# Altium PCB PCB1.PcbDoc
Units mil, origin at the board's own origin, x right, y up, seen from the top; angles counter-clockwise.
Board outline 820 x 2400 mil, 2 copper layers (Top Layer, Bottom Layer); 15 components, 13 nets, 66 pads, 9 vias.
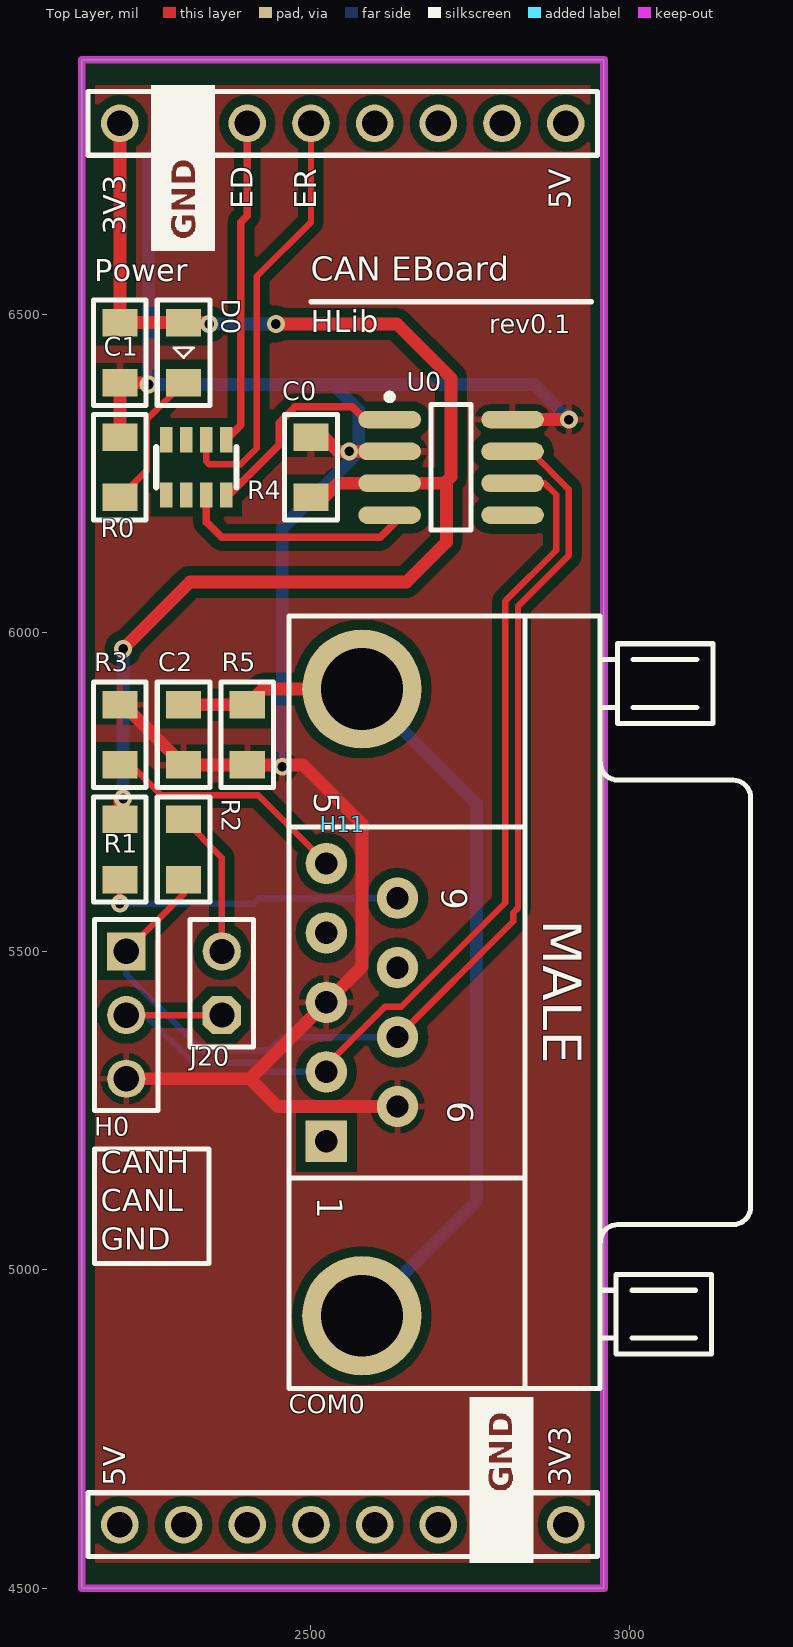
[diagram p0: Top Layer view]
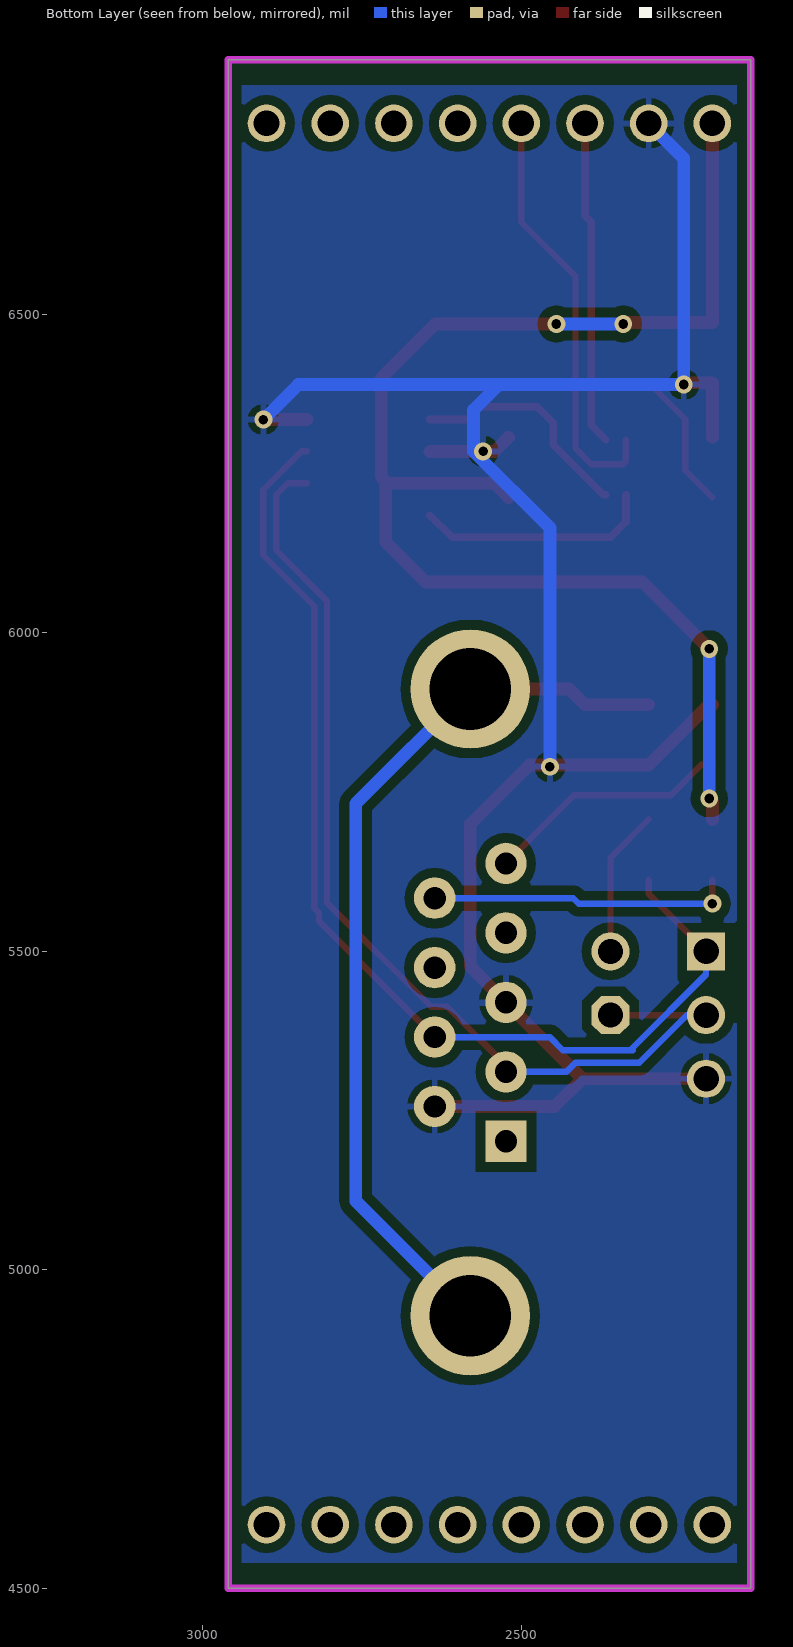
[diagram p1: Bottom Layer view, seen from below]
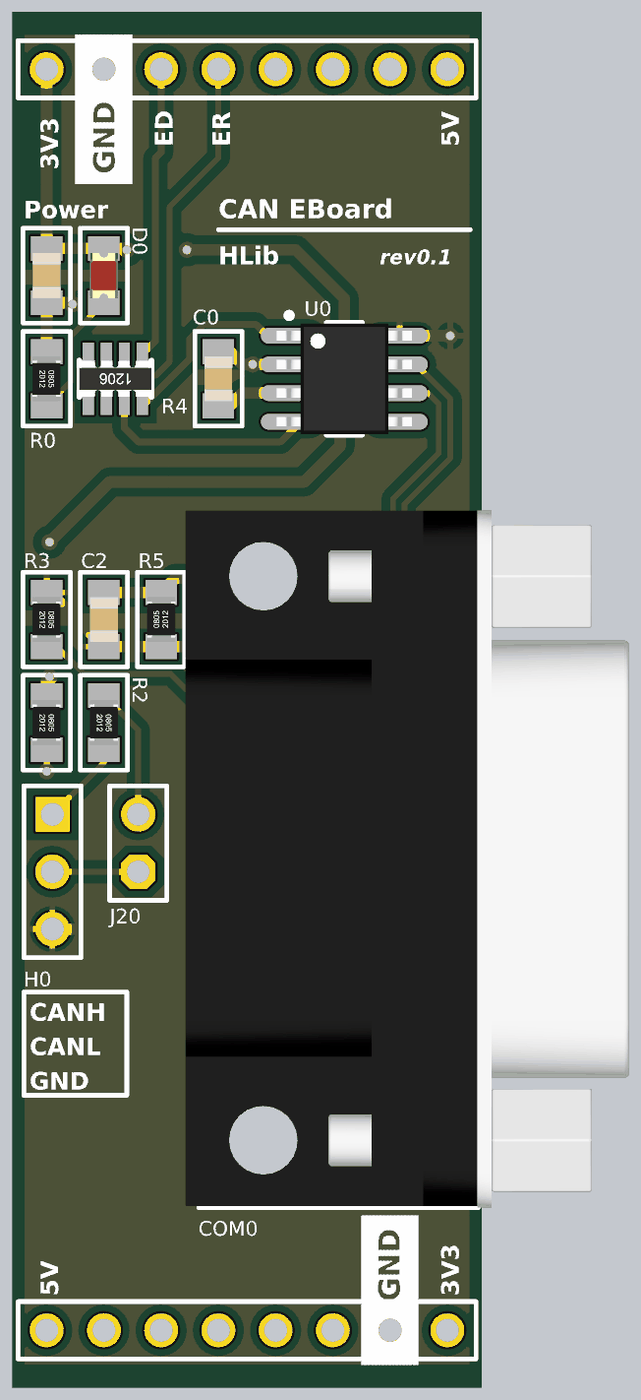
[diagram p2: 3D render of the assembled board from above, using the file's embedded part models]

## Layer stack, top to bottom
Top Solder: solder mask 0.4, Solder Resist, Dk 3.5
Top Layer: signal copper 1.4
Dielectric1: dielectric 12.6, FR-4, Dk 4.8
Bottom Layer: signal copper 1.4
Bottom Solder: solder mask 0.4, Solder Resist, Dk 3.5

## Board outline
2140,4500 2140,6900 2960,6900 2960,4500

## Design rules (kind name [scope] priority, off if disabled: settings)
Clearance [InPolygon] p1: gap=15
Clearance Clearance_1 [All] p2: gap=10
DiffPairsRouting [All] p1: maxlimit=10 minlimit=10 mostfreqgap=10 toplayer_minwidth=10 toplayer_maxwidth=15 toplayer_prefwidth=10 bottomlayer_minwidth=10 bottomlayer_maxwidth=15 bottomlayer_prefwidth=10 maxuncoupledlength=500
PolygonConnect [All] p1: connectstyle=Relief reliefconductorwidth=10 reliefentries=4 polygonreliefangle="90 Angle" airgapwidth=10
RoutingVias [All] p1: holewidth=25 width=40 viastyle="Through Hole" minholewidth=28 minwidth=50 maxholewidth=28 maxwidth=50
SolderMaskExpansion [All] p1: expansion=4
Width [All] p1: maxlimit=25 minlimit=8 preferedwidth=10
29 further rules are at their usual default settings.

## Classes and differential pairs
differential pair CAN: +CAN_P -CAN_N

## Components (designator, comment, footprint, x,y, rotation, side; value= is the part's Value field where it differs from the comment)
C0 "C_Ceramic" SM_0805_C_CERAMIC 2500,6260 r90 top
C1 "C_Ceramic" SM_0805_C_CERAMIC 2200,6440 r270 top
C2 "C_Ceramic" SM_0805_C_CERAMIC 2300,5840 r90 top
COM0 "COM 9 MALE" "DSB 9-M" 2580,5420 r90 top
D0 "LED" SM_0805_LED 2300,6440 r270 top
H0 "Hed3" Hed3 2210,5500 r270 top
H11 "MBoard1_BH_DualPorts" MBoard1_BH_DualPorts 2200,6800 r0 top
J20 "Jumper 2" HD_MALE_2_100mil_straight 2360,5400 r90 top
R0 "R" SM_0805_R 2200,6260 r270 top
R1 "R" SM_0805_R 2200,5840 r270 top
R2 "R" SM_0805_R 2300,5660 r270 top
R3 "R" SM_0805_R 2200,5660 r270 top
R4 "220" RA4 2320,6260 r180 top
R5 "R" SM_0805_R 2400,5840 r90 top
U0 "SN65HVD230" SO-8 2720,6260 r0 top

## Footprints (in the part's own frame and the unit in brackets; to place one, negate y for a bottom-side part, rotate by r counter-clockwise, add the part's x,y. Pads: shape width x height; smd on the part's side, far side on the other; paste and mask are expansions set on the pad)
"DSB 9-M" [mil] "COM MALE D Subminiature; 9 Position; Right Angle; Pitch 1.385 mm"
  rect 65x65 hole 35: 1(-218.11,55.91)
  round 65 hole 35: 2(-109.05,55.91) 3(0,55.91) 4(109.06,55.91) 5(218.11,55.91) 6(-163.58,-55.91) 7(-54.53,-55.91) 8(54.53,-55.91) 9(163.58,-55.91)
  round 187.4 hole 128.35: 10(491.93,0) 11(-491.93,0)
  silkscreen extent -606,-610 606,114, body extent -606,-637 610,138, height 495
HD_MALE_2_100mil_straight [mil]
  oct 60x60 hole 39.37: 1(0,0)
  round 60 hole 39.37: 2(100,0)
  silkscreen extent -50,-50 150,50, body extent -50,-50 150,50, height 315
Hed3 [mil]
  rect 60x60 hole 40: 1(0,0)
  round 60 hole 40: 2(100,0) 3(200,0)
  silkscreen extent -50,-50 250,50, body extent -50,-50 250,50, height 315
MBoard1_BH_DualPorts [mm]
  round 1.5 hole 1.02: 1(0,0) 2(2.54,0) 3(5.08,0) 4(7.62,0) 5(10.16,0) 6(12.7,0) 7(15.24,0) 8(17.78,0) 9(17.78,-55.88) 10(15.24,-55.88) 11(12.7,-55.88) 12(10.16,-55.88) 13(7.62,-55.88) 14(5.08,-55.88) 15(2.54,-55.88) 16(0,-55.88)
  silkscreen extent -1.27,-57.15 19.05,1.27, body extent -1.27,-57.15 19.05,1.27, height 8
RA4 [mm] "Resistor Array (0603x4) form TME"
  rect 0.5x1 smd: 1(-1.2,-1.1) 2(-1.2,1.1) 3(-0.4,-1.1) 4(-0.4,1.1) 5(0.4,-1.1) 6(0.4,1.1) 7(1.2,-1.1) 8(1.2,1.1)
  silkscreen extent -1.6,-0.8 1.6,0.8, body extent -1.6,-0.8 1.6,0.8, height 0.5
SM_0805_C_CERAMIC [mm] "General Surface-mount cap, low density"
  rect 1.1x1.4 smd: 1(-1.2,0) 2(1.2,0)
  silkscreen extent -2.1,-1.05 2.1,1.05, body extent -1,-0.62 1,0.63, height 0.58
SM_0805_LED [mm] "General polarized surface-mount Led, low density"
  rect 1.1x1.4 smd: 1(-1.2,0) 2(1.2,0)
  silkscreen extent -2.1,-1.05 2.1,1.05, body extent -1.01,-0.62 1.01,0.63, height 1.1
SM_0805_R [mm] "General Surface-mount resistor, low density"
  rect 1.1x1.4 smd: 1(-1.2,0) 2(1.2,0)
  silkscreen extent -2.1,-1.05 2.1,1.05, body extent -1,-0.63 1,0.62, height 0.45
SO-8 [mm]
  oval 2.5x0.7 smd: 1(-2.45,1.905) 2(-2.45,0.635) 3(-2.45,-0.635) 4(-2.45,-1.905) 5(2.45,-1.905) 6(2.45,-0.635) 7(2.45,0.635) 8(2.45,1.905)
  silkscreen extent -2.57,-2.5 0.8,2.93, body extent -3,-2.45 3,2.45, height 1.75

## Part data
C0 C1 C2: "Non-polarity ceramic capacitor"
COM0: library part DSB9F, "COM 9"
J20: library part "JP 2"
R0 R1 R2 R3 R5: "Resistor"
R4: library part RA4

## Via types
v1: diameter 28, hole 15, Top Layer to Bottom Layer, tented both sides, 9 vias

## Nets (pads, with @x,y where several pads share a name; then routed paths per layer and width w, separated by ;. In a path a pad name is that pad's centre, name@x,y a point inside that pad or via, vN(x,y) a via of type N, cw(c..) or ccw(c..) an arc to the next point about the centre after c; other vN are vias at no path point)
3V3: C0.1 C1.1 D0.1 H11.1 R3.1 U0.3 | length 2177.7
  Top Layer w20: R3.1 2200,5735 v1(2205,5740) ; H11.1 C1.1 D0.1 2337.76,6487.24 v1(2340,6485) ; v1(2205,5975) 2310,6080 2650,6080 2712.76,6142.76 2712.76,6232.24 2710,6235 ; v1(2445,6485) 2635,6485 2720,6400 2720,6245 2710,6235 ; C0.1@2520,6212.76 2542.24,6235 2643.54,6235 2710,6235
  Bottom Layer w20: v1(2205,5740) v1(2205,5975) ; v1(2340,6485) v1(2445,6485)
CAN_N: COM0.2 H0.2 J20.1 U0.6 | length 1627.2
  Top Layer w10: H0.2 J20.1 ; COM0.2 2524.09,5320.84 2616.23,5412.97 2641.53,5412.97 2805,5576.45 2805,6050 2885,6130 2885,6216.72 2866.72,6235 U0.6@2836.46,6235
  Bottom Layer w10: H0.2 2240,5400 2315,5325 2415,5325 2429.05,5310.95 COM0.2
CAN_P: COM0.7 H0.1 R2.2 U0.7 | length 1736.4
  Top Layer w10: H0.1 2300,5590 R2.2 ; COM0.7 2817.72,5547.28 2817.72,5560.88 2825,5568.16 2825,6041.72 2905,6121.72 2905,6225 2845,6285 U0.7@2836.46,6285
  Bottom Layer w10: H0.1 2210,5463.64 2325,5348.64 2325,5345 2435,5345 2455.47,5365.47 COM0.7
CAN_RX: R4.4 U0.4 | length 374.8
  Top Layer w12: R4.4 2335.75,6174.25 2360,6150 2608.54,6150 U0.4@2643.54,6185
CAN_TX: R4.2 U0.1 | length 362.2
  Top Layer w12: R4.2 2371.39,6216.69 2450,6295.3 2450,6330 2475,6355 2565,6355 2585,6335 U0.1@2643.54,6335
GND: C0.2 C1.2 C2.1 COM0.3 COM0.6 H0.3 H11.2 R0.1 R1.1 R5.1 U0.2 U0.8 | length 3489.2
  Top Layer w20: R1.1 2205.51,5887.24 C2.1 R5.1 2487.24,5792.76 2580,5700 2580,5475.91 COM0.3 2404.09,5300 ; R0.1 C1.2 2242.24,6392.76 v1(2245,6390) ; H0.3 2404.09,5300 ; C0.2@2520,6307.24 2542.24,6285 2575,6285 U0.2@2643.54,6285 ; COM0.6 2447.68,5256.42 2404.09,5300 ; U0.8@2836.46,6335 v1(2905,6335)
  Bottom Layer w20: H11.2 2245,6745 v1(2245,6390) 2535,6390 ; v1(2455,5790) 2455,6165 2575,6285 2575,6350 2535,6390 ; v1(2905,6335) 2850,6390 2535,6390
  other v1: 2560,6285
NetC2_2: C2.2 COM0.10 COM0.11 R5.2 | length 1423.2
  Top Layer w20: C2.2 R5.2 2424.69,5911.93 COM0.10
  Bottom Layer w20: COM0.11 2760,5108.07 2760,5731.93 COM0.10
NetCOM0_5: COM0.5 R1.2 | length 388.2
  Top Layer w10: R1.2 2217.24,5792.76 2265,5745 2417.2,5745 COM0.5
NetCOM0_9: COM0.9 R3.2 | length 477.2
  Top Layer w10: v1(2200,5575) R3.2
  Bottom Layer w10: v1(2200,5575) 2410,5575 2418.58,5583.58 COM0.9
NetD0_2: D0.2 R0.2 | length 221.4
  Top Layer w10: R0.2 2242.56,6255.32 2242.56,6335.31 D0.2
NetH11_3: H11.3 R4.1 | length 510.3
  Top Layer w12: R4.1 2390,6326.06 2390,6645 2400,6655 H11.3
NetH11_4: H11.4 R4.3 | length 670.6
  Top Layer w10: R4.3 2335.75,6269.25 2340,6265 2390,6265 2415,6290 2415,6560 2500,6645 H11.4
NetJ20_2: J20.2 R2.1 | length 232.1
  Top Layer w10: R2.1 2360,5647.24 J20.2
pads on no net: COM0.1 COM0.4 COM0.8 H11.5 H11.6 H11.7 H11.8 H11.9 H11.10 H11.11 H11.12 H11.13 H11.14 H11.15 H11.16 R4.5 R4.6 R4.7 R4.8 U0.5

## Polygon pours and split planes (outlines as drawn)
GND on Top Layer "Top" (solid, remove dead copper, pour order 6): 2140,6860 2960,6860 2960,4540 2140,4540
GND on Bottom Layer "Bot" (solid, remove dead copper, pour order 8): 2140,6860 2960,6860 2960,4540 2140,4540

## Keep-outs
Keep-Out Layer:
  the board outline again, w12

## Silkscreen, mask and mechanical layers (free items; w line width, h text height)
Top Overlay:
  drawing of 611 lines, arcs and shapes, not listed
  text "ED" at 2420,6665 h60 r90
  text "ER" at 2520,6665 h60 r90
  text "5V" at 2920,6665 h60 r90
  text "3V3" at 2220,6625 h60 r90
  text "Power" at 2160,6540 h60
  text "CAN EBoard" at 2500,6540 h65
  text "HLib" at 2500,6460 h60
  text "rev0.1" at 2780,6460 h50
  text "CANH" at 2170,5140 h60
  text "CANL" at 2170,5080 h60
  text "GND" at 2170,5020 h60
  text "5V" at 2220,4660 h60 r90
  text "3V3" at 2920,4660 h60 r90
Drill Drawing:
  text ".LEGEND" at 7200,3200 h60
  text "Drill Drawing." at 7200,3100 h60

## Dimensions
2140,4500 to 2960,4500 on Mechanical 1
2140,4500 to 2140,6900 on Mechanical 1

## Text inside footprints (layer, text, board x,y; h text height)
COM0: Top Overlay "MALE" at 2865,5550 h60 r270; Top Overlay "1" at 2510,5115 h40 r270; Top Overlay "5" at 2505,5750 h40 r270; Top Overlay "9" at 2705,5600 h40 r270; Top Overlay "6" at 2715,5265 h40 r270